# Altium PCB A00B01-AST.PcbDoc
Units mil, origin at the board's own origin, x right, y up, seen from the top; angles counter-clockwise.
Board outline 2310.03 x 1090.03 mil, 2 copper layers (Top Layer, Bottom Layer); 37 components, 26 nets, 133 pads, 49 vias.
Unrouted connection lines stored in the file: 1.
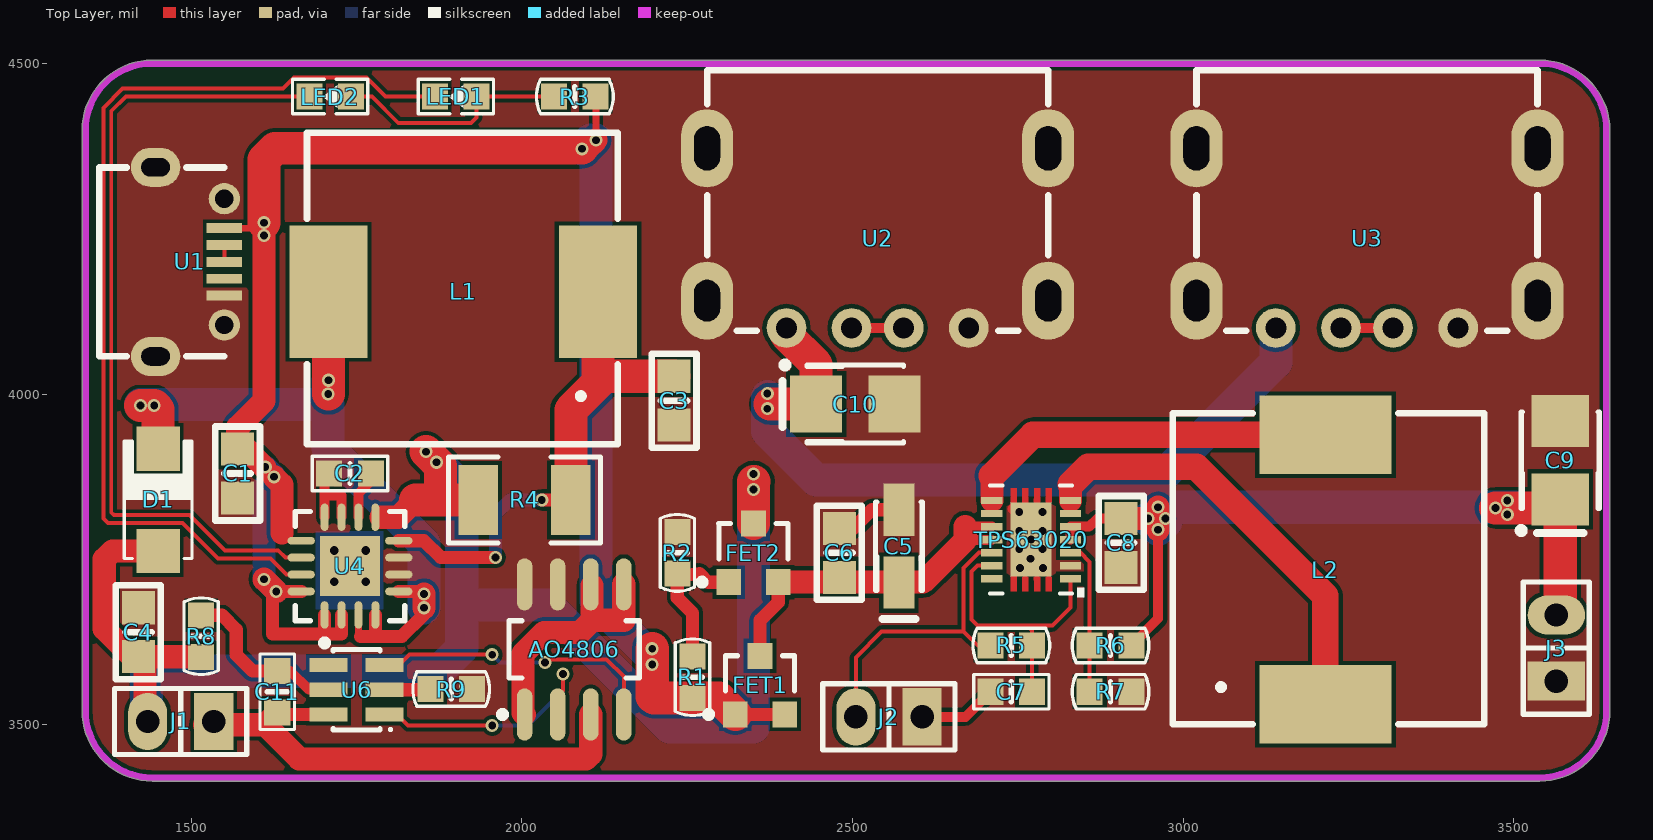
[diagram p0: Top Layer view]
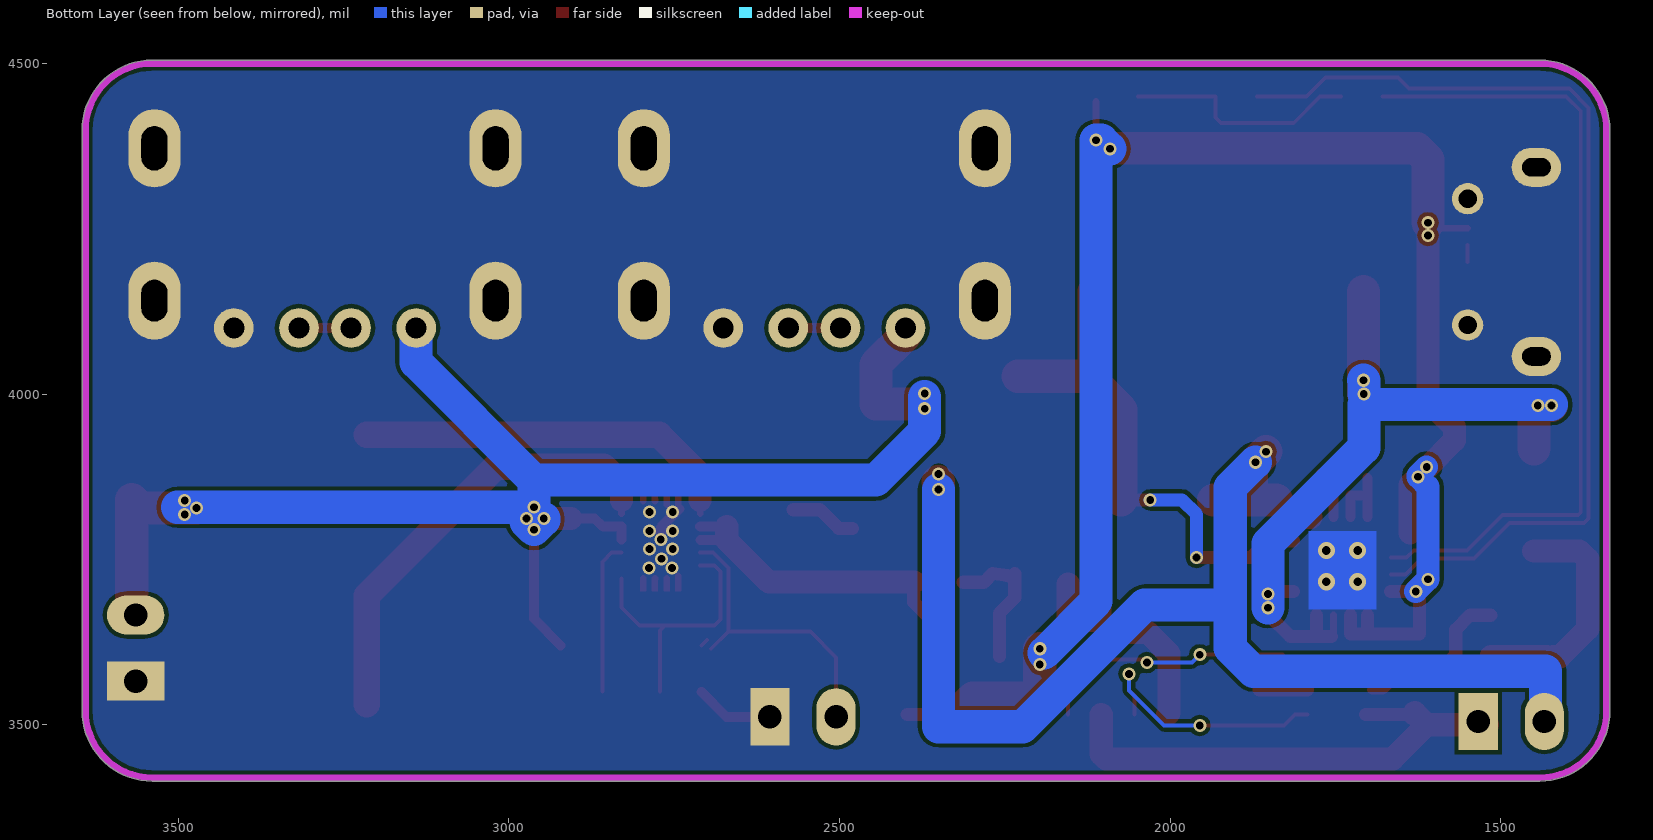
[diagram p1: Bottom Layer view, seen from below]

## Layer stack, top to bottom
Top Solder: solder mask 0.4, Solder Resist, Dk 3.5
Top Layer: signal copper 1.4
Dielectric 1: dielectric 12.6, FR-4, Dk 4.8
Bottom Layer: signal copper 1.4
Bottom Solder: solder mask 0.4, Solder Resist, Dk 3.5

## Board outline
1441,3414.99 cw(c1441,3521) 1334.98,3521 1334.98,4399 cw(c1441,4399) 1441,4505.02 3539,4505.02 cw(c3539,4399) 3645.01,4399 3645.01,3521 cw(c3539,3521) 3539,3414.99

## Design rules (kind name [scope] priority, off if disabled: settings)
Clearance [All] p1: gap=6
PlaneConnect PlaneConnect_1 [InNet('GND')] p1: planeconnectstyle=Direct reliefexpansion=20 reliefentries=4 reliefconductorwidth=10 reliefairgap=10
PlaneConnect [All] p2: planeconnectstyle=Relief reliefexpansion=20 reliefentries=4 reliefconductorwidth=10 reliefairgap=10
PolygonConnect PolygonConnect_1 [InNet('GND')] p1: connectstyle=Direct reliefconductorwidth=10 reliefentries=4 polygonreliefangle="90 Angle" airgapwidth=10
PolygonConnect [All] p2: connectstyle=Relief reliefconductorwidth=10 reliefentries=4 polygonreliefangle="90 Angle" airgapwidth=10
RoutingVias [All] p1: holewidth=28 width=50 viastyle="Through Hole" minholewidth=28 minwidth=50 maxholewidth=28 maxwidth=50
SolderMaskExpansion [All] p1: expansion=4
Width [All] p1: maxlimit=200 minlimit=6 preferedwidth=10 minimp=50.000000 maximp=50.000000 favimp=50.000000
29 further rules are at their usual default settings.

## Components (designator, comment, footprint, x,y, rotation, side; value= is the part's Value field where it differs from the comment)
AO4806 "U7" SOP-8 2079,3614 r90 top
C1 "22uF 0805" SMT_C_0805 1570,3880 r270 top
C2 "0.1uF" SMT_C_0603 1740,3880 r0 top
C3 "22uF 0805" SMT_C_0805 2230,3990 r270 top
C4 "22uF 0805" SMT_C_0805 1420,3640 r90 top
C5 "100uF 6.3V" SMT_C_Tantalum_A 2570,3770 r90 top
C6 "22uF 6.3V" SMT_C_0805 2480,3760 r90 top
C7 "0.1uF" SMT_C_0603 2740,3550 r180 top
C8 "22uF 6.3V" SMT_C_0805 2906,3775 r270 top
C9 "220uF 6.3V" SMT_C_Tantalum_B 3570,3900 r90 top
C10 "220uF 6.3V" SMT_C_Tantalum_B 2504,3985 r0 top
C11 "100nF" SMT_C_0603 1630,3550 r90 top
D1 "SS24" SMT_DIODE_DO_214AC 1450,3840 r90 top
FET1 "AO3402-N-Ch-MOSFET" AO3402-N-Ch-MOSFET 2360,3560 r0 top
FET2 "AO3401-P-Ch-MOSFET" AO3401-P-Ch-MOSFET 2350,3760 r0 top
J1 "THT_Male_P_1x2" THT_Male_P_1x2-2.54mm 1534,3505 r270 top
J2 "THT_Male_P_1x2" THT_Male_P_1x2-2.54mm 2605,3512 r270 top
J3 "THT_Male_P_1x2" THT_Male_P_1x2-2.54mm 3564,3566 r180 top
L1 "4.7uH" SMT_L_11.5mm 1910,4160 r180 top
L2 "1uH" SMT_L_11.5mm 3220,3736 r90 top
LED1 "SMT_LED_0603" SMT_LED_0603 1900,4450 r180 top
LED2 "SMT_LED_0603" SMT_LED_0603 1710,4450 r180 top
R1 "100oHm" SMT_R_0603 2258,3572 r90 top
R2 "5.6K" SMT_R_0603 2235,3760 r90 top
R3 "1K" SMT_R_0603 2080,4450 r0 top
R4 "0.05R" 1210 2004,3840 r0 top
R5 "12K" SMT_R_0603 2740,3620 r180 top
R6 "1M" SMT_R_0603 2890,3620 r0 top
R7 "180K" SMT_R_0603 2890,3550 r180 top
R8 "100R" SMT_R_0603 1515,3634 r90 top
R9 "1k" SMT_R_0603 1893,3554 r180 top
TPS63020 "U5" VSON-14 2770,3780 r180 top
U1 "USB_Micro_5S_B" USB_MICRO_5S_B 1550,4200 r90 top
U2 "USB-A-Female-SMD" USB-A-SMD 2400,4100 r0 top
U3 "USB-A-Female-SMD" USB-A-SMD 3140,4100 r0 top
U4 "TP5000" QFN-16 1740,3740 r90 top
U6 "DW01-PLUS" SOT23-6 1750,3553 r90 top

## Footprints (in the part's own frame and the unit in brackets; to place one, negate y for a bottom-side part, rotate by r counter-clockwise, add the part's x,y. Pads: shape width x height; smd on the part's side, far side on the other; paste and mask are expansions set on the pad)
1210 [mil] "贴片元件"
  rect 60x106.3 smd: 1(-70,0) 2(70,0)
  silkscreen extent -115,-65 115,65, body extent -65,-50 65,50, height 39
AO3401-P-Ch-MOSFET [mm] "AO3401-P-Ch-MOSFET"
  rect 0.95x1 smd: 1(-0.95,-1.125) 2(0.95,-1.125) 3(0,1.125)
  silkscreen extent -2.1,-1.25 1.32,1.13, body extent -1.45,-1.4 1.45,1.4, height 1.3
AO3402-N-Ch-MOSFET [mm] "AO3402-N-Ch-MOSFET"
  rect 0.95x1 smd: 1(-0.95,-1.125) 2(0.95,-1.125) 3(0,1.125)
  silkscreen extent -2.1,-1.25 1.32,1.13, body extent -1.45,-1.4 1.45,1.4, height 1.3
QFN-16 [mm] "QFN"
  oval 1.05x0.3 smd: 1(-1.875,0.975) 2(-1.875,0.325) 3(-1.875,-0.325) 4(-1.875,-0.975) 9(1.875,-0.975) 10(1.875,-0.325) 11(1.875,0.325) 12(1.875,0.975)
  oval 0.3x1.05 smd: 5(-0.975,-1.875) 6(-0.325,-1.875) 7(0.325,-1.875) 8(0.975,-1.875) 13(0.975,1.875) 14(0.325,1.875) 15(-0.325,1.875) 16(-0.975,1.875)
  rect 2.3x2.3 smd: 17(0,0)
  silkscreen extent -3.07,-2.1 2.1,2.1, body extent -2.07,-2.07 2.07,2.07, height 0.8
SMT_C_0603 [mm] "Surface mount capacitor 0603"
  rect 1x1 smd: 1(-0.8,0) 2(0.8,0)
  silkscreen extent -1.45,-0.66 1.45,0.66, body extent -1,-0.39 1,0.39, height 0.79
SMT_C_0805 [mil] "Surface mount capacitor 0805"
  rect 50x50 smd: 1(-37,0) 2(37,0)
  silkscreen extent -71,-34 71,34, body extent -49,-24 49,25, height 31
SMT_C_Tantalum_A [mm] "Capacitor, SM Tantalum; Body 3.2 x 1.6 mm (LxW typ)"
  rect 2x1.2 smd: 1(-1.4,0) 2(1.4,0)
  silkscreen extent -2.79,-0.9 1.7,0.9, body extent -1.6,-0.8 1.6,0.8, height 1.6
SMT_C_Tantalum_B [mm] "Capacitor, SM Tantalum; Body 3.5 x 2.8 mm (LxW typ)"
  rect 2x2.2 smd: 1(-1.5,0) 2(1.5,0)
  silkscreen extent -2.82,-1.5 1.85,1.62, body extent -1.75,-1.4 1.75,1.4, height 1.9
SMT_DIODE_DO_214AC [mm] "DO-214AC(SMA) Package"
  rect 1.7x1.67 smd: 1(-1.965,0) 2(1.965,0)
  silkscreen extent -2.25,-1.3 2.25,1.3, body extent -2.6,-1.3 2.6,1.3, height 2.35
SMT_L_11.5mm [mil] "Vishay HLP4040 SMT Inductor,11.5x11.5x4mm"
  rect 118.11x200 smd: 1(-205,5) 2(202.5,5)
  silkscreen extent -235,-235 235,236, body extent -236,-235 235,236, height 157
SMT_LED_0603 [mm] "SMT LED"
  rect 1x1 smd: 1(-0.8,0) 2(0.8,0)
  silkscreen extent -1.45,-0.66 1.45,0.66, body extent -0.81,-0.4 0.81,0.4, height 0.6
SMT_R_0603 [mm] "Surface mount resistor 0603"
  rect 1x1 smd: 1(-0.8,0) 2(0.8,0)
  silkscreen extent -1.47,-0.66 1.47,0.66, body extent -1,-0.39 1,0.39, height 0.79
SOP-8 [mm] "8-Pin Small Outline Integrated Circuit 1.27 mm Pitch, IPC Low Density"
  oval 2x0.6 smd: 1(-2.5,1.905) 2(-2.5,0.635) 3(-2.5,-0.635) 4(-2.5,-1.905) 5(2.5,-1.905) 6(2.5,-0.635) 7(2.5,0.635) 8(2.5,1.905)
  silkscreen extent -2.62,-2.5 1.1,2.88, body extent -2.92,-2.45 2.86,2.45, height 1.45
SOT23-6 [mm] "SOT-457/SC-74; 6 Leads; Body 3 x 3 mm, inc. leads (LxW max)"
  rect 0.55x1.45 smd: 1(-0.95,-1.075) 2(0,-1.075) 3(0.95,-1.075) 4(0.95,1.075) 5(0,1.075) 6(-0.95,1.075)
  silkscreen extent -1.57,-1.35 1.55,0.9, body extent -1.45,-1.4 1.45,1.4, height 1.45
THT_Male_P_1x2-2.54mm [mm] "THT Male pin header strip 1x2 2.54mm pitch"
  rect 2.2x1.5 hole 0.9: 1(0,0)
  oval 2.2x1.5 hole 0.9: 2(0,-2.54)
  silkscreen extent -1.27,-3.81 1.27,1.27, body extent -1.46,-3.81 1.46,1.27, height 8.51
USB-A-SMD [mm]
  round 1.524 hole 0.8: 1(0,0) 2(2.5,0) 3(4.5,0) 4(7,0)
  oval 2x3 hole 1 slot 1.6 at 90 deg: 5(10.05,1.05) 8(-3.05,1.05)
  oval 2x3 hole 1 slot 1.7 at 90 deg: 6(10.05,6.9) 7(-3.05,6.9)
  silkscreen extent -3.05,-0.1 10.05,9.9, body extent -3.56,-0.13 10.54,9.91, height 6.7
USB_MICRO_5S_B [mil] "USB Micro SMT 5S B"
  rect 15x54 smd: 1(51,0) 2(25.5,0) 3(0,0) 4(-25.5,0) 5(-51,0)
  oval 59.06x74.8 hole 27.56 slot 43.31 at 90 deg: 6(-143,104) 7(143,104)
  round 47.24 hole 27.5: 8(95.5,0) 9(-95.5,0)
  silkscreen extent -143,0 143,189, body extent -161,-9 161,204, height 105
VSON-14 [mm]
  rect 0.82x0.28 smd paste-0.397: 1(-1.51,1.5) 2(-1.51,1) 3(-1.51,0.5) 4(-1.51,0) 5(-1.51,-0.5) 6(-1.51,-1) 7(-1.51,-1.5) 8(1.51,-1.5) 9(1.51,-1) 10(1.51,-0.5) 11(1.51,0) 12(1.51,0.5) 13(1.51,1) 14(1.51,1.5)
  rect 1.58x2.85 smd paste-1.412 mask-1.41: 15(0,0)
  Top Layer region: -0.56,1.975 -0.56,1.527 -0.79,1.527 -0.79,1.975
  Top Layer region: -0.11,1.975 -0.11,1.527 -0.34,1.527 -0.34,1.975
  Top Layer region: 0.11,1.975 0.11,1.527 0.34,1.527 0.34,1.975
  Top Layer region: 0.56,1.975 0.56,1.527 0.79,1.527 0.79,1.975
  Top Layer region: 0.56,-1.975 0.56,-1.527 0.79,-1.527 0.79,-1.975
  Top Layer region: 0.11,-1.975 0.11,-1.527 0.34,-1.527 0.34,-1.975
  Top Layer region: -0.11,-1.975 -0.11,-1.527 -0.34,-1.527 -0.34,-1.975
  Top Layer region: -0.56,-1.975 -0.56,-1.527 -0.79,-1.527 -0.79,-1.975
  silkscreen extent -2.03,-2.07 1.58,2.22

## Part data
AO4806: library part AO4806
C1 C3 C4 C6 C8: library part SMT_C_0805, "Surface mount capacitor 0805"
C2 C7 C11: library part SMT_C_0603, "Surface mount capacitor 0603"
C5: library part SMT_C_Tantalum_A, "Capacitor, SM Tantalum; Body 3.2 x 1.6 mm (LxW typ)"
C9 C10: library part SMT_C_Tantalum_B, "Capacitor, SM Tantalum; Body 3.5 x 2.8 mm (LxW typ)"
D1: library part SMT_DIODE_SCHOTTKY_DO_214AC, "Surface mount schottky diode DO-214AC(SMA) Package"
FET1: "AO3402-N-Ch,4A,30V.RDS(ON) = 0.11Ω @ VGS = 2.5V"
FET2: "AO3401-P-Ch,-4.2A, -30V.RDS(ON) = 0.12Ω @ VGS = -2.5 V"
J1 J2 J3: "THT Male pin header strip 1x2"
L1 L2: library part SMT_L_11.5mm, "Vishay HLP4040 SMT Inductor,11.5x11.5x4mm"
LED1 LED2: "SMT LED"
R1 R2 R3 R5 R6 R7 R8 R9: library part SMT_R_0603, "Surface mount resistor 0603"
R4: library part SMT_R_0805, "Surface mount resistor 0805"
TPS63020: library part TPS63020
U1: "USB micro female SMT with 4 fixed foot"
U6: "One Cell Lithium-ion/Polymer Battery Protection IC"

## Via types
v1: diameter 19.68, hole 11.81, Top Layer to Bottom Layer, 45 vias
v2: diameter 25.98, hole 12.99, Top Layer to Bottom Layer, tented top, 4 vias

## Nets (pads, with @x,y where several pads share a name; then routed paths per layer and width w, separated by ;. In a path a pad name is that pad's centre, name@x,y a point inside that pad or via, vN(x,y) a via of type N, cw(c..) or ccw(c..) an arc to the next point about the centre after c; other vN are vias at no path point)
BAT_GND: AO4806.3 C11.1 J1.1 U6.6 | length 771.9
  Top Layer w20: C11.1@1630,3515.67 U6.6@1704.6,3515.67
  Top Layer w35: J1.1@1520,3500 C11.1@1611.5,3500 ; C11.1@1630,3515.67 C11.1 C11.1@1611.5,3500 ; AO4806.3 2104,3455.5 2097,3448.5 1663,3448.5 C11.1@1611.5,3500
CHG_STDBY: LED2.2 U4.14 | length 1231.1
  Top Layer w6: U4.14 1642.2,3752.8 1631.5,3763.5 1551,3763.5 1497.4,3817.1 1408.43,3817.1 1408.33,3817 1383,3817 1379,3821 1379,4428 1401,4450 LED2.2
EN: J2.2 R5.2 TPS63020.12 | length 465.4
  Top Layer w6: J2.2 2505,3602 2544,3641 2668,3641 ; R5.2@2694,3615 2668,3641 ; R5.2@2700.5,3628 R5.2 ; TPS63020.12 2691.31,3760.31 2668,3737 2668,3641
GND: AO4806.7 AO4806.8 C1.2 C2.1 C3.2 C4.2 C5.2 C6.2 C7.2 C8.2 C9.2 C10.2 J2.1 J3.1 R2.2 R7.1 R9.1 TPS63020.2 TPS63020.15 U1.5 U1.6 U1.7 U1.8 U1.9 U2.4 U2.5 U2.6 U2.7 U2.8 U3.4 U3.5 U3.6 U3.7 U3.8 U4.6 U4.7 U4.11 U4.12 U4.17 | length 397
  Top Layer w15: U4.12 1701.61,3847 ; C2.1@1701.61,3873.11 1701.61,3847 ; U4.11 1727,3814.02 1727,3847 1701.61,3847 ; J2.1 2670.5,3512 C7.2 ; TPS63020.15@2742,3826.6 2770,3798.6 v1(2770,3780)
  Top Layer w20: C6.2 2501,3797 2529.12,3825.12 C5.2
  other v1: 2753,3737 2788,3737 2769,3751 2752,3766 2787,3766 2752,3793 2787,3793 2752,3822 2787,3822
LED_CHRG: LED1.2 U4.15 | length 1487.7
  Top Layer w6: U4.15 1643.8,3727.2 1619.5,3751.5 1540.2,3751.5 1486.6,3805.1 1413.4,3805.1 1413.3,3805 1374.03,3805 1367,3812.03 1367,4432.97 1396.03,4462 1638.41,4462 1655.09,4478.69 1764.91,4478.69 1793.59,4450 LED1.2
NetAO4806_1: AO4806.1 AO4806.5 AO4806.6 | length 373.2
  Top Layer w35: AO4806.1 2001.66,3517.92 2001.66,3607.81 2033.19,3639.34 2087.34,3639.34 2106,3658 ; AO4806.6@2106,3710.43 2106,3658 ; AO4806.5 2154,3658 2106,3658
NetAO4806_2: AO4806.2 U6.1 | length 388.2
  Top Layer w6: U6.1 1811.4,3515.6 1828,3499 v1(1955,3499) ; AO4806.2 2054,3544 2062,3552 v1(2062,3577)
  Bottom Layer w6: v1(1955,3499) 2009,3499 2062,3552 v1(2062,3577)
NetAO4806_4: AO4806.4 U6.3 | length 443.2
  Top Layer w6: U6.3 1814.4,3590.4 1830,3606 v1(1955,3606) ; v1(2035,3594) 2039.84,3598.84 2128.16,3598.84 2154,3573 AO4806.4
  Bottom Layer w6: v1(1955,3606) 1967,3594 v1(2035,3594)
NetC2_2: C2.2 U4.10 | length 73.9
  Top Layer w15: U4.10 1752.8,3849.8 1771.5,3868.5 C2.2
NetC3_1: C3.1 L1.1 R4.2 U4.8 | length 781.8
  Top Layer w20: U4.8 1851.61,3778.39 1877,3753 v1(1960,3753) ; v1(2030,3840) R4.2
  Top Layer w50: R4.2 2074,3976 2115,4017 L1.1 ; 2125,4027 C3.1
  Bottom Layer w20: v1(1960,3753) 1960,3818 1982,3840 v1(2030,3840)
NetC7_1: C7.1 R5.1 TPS63020.1 TPS63020.13 | length 418.3
  Top Layer w6: TPS63020.13 2688.6,3740.63 2680,3732.03 2680,3659 2689,3650 2764,3650 ; C7.1 R5.1 2771.5,3642.5 2764,3650 ; TPS63020.1 2829.45,3677.45 2802,3650 2764,3650
NetC11_2: C11.2 R8.2 U6.5 | length 248.9
  Top Layer w15: C11.2 1649.5,3581.5 1678,3553 U6.5@1695,3553
  Top Layer w20: R8.2 1546.5,3665.5 1568,3644 1568,3606 1592.5,3581.5 C11.2
NetD1_2: D1.2 L1.2 U4.3 U4.4 U4.5 | length 1137.9
  Top Layer w10: 1752.8,3630.8 U4.3
  Top Layer w20: 1756.02,3633.61 1778.39,3633.61 ; U4.4 1778.39,3633.61 ; U4.5 1839.39,3701.61 ; 1850,3665 1818.61,3633.61 1778.39,3633.61
  Top Layer w35: v1(1852,3677) v1(1852,3698)
  Top Layer w50: v1(1423,3983) v1(1444,3983) 1450,3977 D1.2 ; v1@1707.5,4000 L1.2
  Bottom Layer w50: v1@1423,3984 1707,3984 1707,3918.82 1852,3773.82 v1(1852,3677) ; v1(1707,4000) 1707,4020.5 v1(1707.5,4021)
NetFET2_1: FET2.1 R1.2 R2.1 | length 207.6
  Top Layer w20: R2.1 2235,3692 2258,3669 R1.2 ; R2.1@2245,3725.5 2268.5,3728.5 2281.29,3715.71 FET2.1
NetL2_1: L2.1 TPS63020.6 TPS63020.7 | length 685.4
  Top Layer w10: TPS63020.6 TPS63020.7
  Top Layer w35: TPS63020.7 2829.45,3863.45
  Top Layer w40: 2829.45,3863.45 2856,3890 3020,3890 3215,3695 L2.1
NetL2_2: L2.2 TPS63020.8 TPS63020.9 | length 587.3
  Top Layer w10: TPS63020.9 TPS63020.8
  Top Layer w35: TPS63020.8 2710.55,3876.55
  Top Layer w40: 2710.55,3876.55 2772.5,3938.5 L2.2
NetLED1_1: LED1.1 LED2.1 R3.1 | length 358.6
  Top Layer w6: LED2.1 1773,4450 1813,4410 1923,4410 1931.5,4418.5 LED1.1 R3.1
NetR6_1: R6.1 R7.2 TPS63020.3 | length 231.3
  Top Layer w6: TPS63020.3 2844.68,3760.32 2858.5,3746.5 R7.2
NetR9_2: R9.2 U6.2 | length 73.2
  Top Layer w20: U6.2 R9.2@1865.5,3553
NetU1_2: U1.2 U1.3 | length 25.5
  Top Layer w6: U1.3 U1.2
NetU2_2: U2.2 U2.3 | length 78.7
  Top Layer w15: U2.2 U2.3
NetU3_2: U3.2 U3.3 | length 78.7
  Top Layer w15: U3.2 U3.3
VCC_BAT: C4.1 D1.1 FET2.3 J1.2 R4.1 R8.1 U4.9 | length 2486.4
  Top Layer w20: C4.1 C4.1@1430,3603
  Top Layer w35: C4.1 1410.77,3603 1368.5,3645.27 1368.5,3750.5 1380.64,3762.64 D1.1 ; J1.2@1430,3510 1430,3603 R8.1@1514.5,3603 ; 1787,3813.82 1812.82,3813.82 1839,3840
  Top Layer w50: 1839,3840 1877,3840 ; v1(1855,3913) v1(1871,3897) 1877,3891 1877,3840 ; R4.1 1877,3840 ; FET2.3 v1(2350,3856) 2350,3868 2351,3868
  Bottom Layer w50: J1.2@1432,3512 1432,3581 1874,3581 1909,3616 1909,3681 ; v1(1871,3897) 1909,3859 1909,3681 ; v1(2350,3856) 2350,3497 2222.8,3497 2038.8,3681 1909,3681
  other v1: 2350,3879
VCC_INPUT: C1.1 FET1.1 FET1.2 R1.1 R3.2 U1.1 U4.1 U4.2 U4.13 U4.16 | length 2831.7
  Top Layer w10: U1.1 1601.84,4251 v1(1610,4259.16) ; v1(2112,4384) R3.2@2112,4442.5
  Top Layer w20: U4.16 v1(1628.39,3701.61) 1622.8,3696.02 1622.8,3637.2 1727.2,3637.2 U4.2 ; 1701.61,3641.61 U4.1 ; FET1.1 FET1.2
  Top Layer w35: v1(1610,3720) v1(1628.39,3701.61) ; v1(1610,4259.16) v1(1610,4240) 1610,3990 1570,3950 1570,3930 v1@1611,3889 ; v1(1625,3875) 1637,3863 1637,3790 ; v1@2099,4371 v1(2112,4384)
  Top Layer w50: v1(1610,4259.16) 1610,4355 1626.33,4371.33 v1@2091,4372.31 ; v1(2197,3615) v1(2197,3591) 2197,3543 2199.5,3540.5 R1.1 2297.8,3540.5 FET1.1
  Bottom Layer w35: v1(1612,3890) 1625,3877 v1(1625,3875) 1610,3860 v1(1610,3720) v1(1628.39,3701.61)
  Bottom Layer w50: v1(2091,4371) 2104,4384 v1(2112,4384) 2112,3687 v1@2190.5,3608.5
VCC_VBUS: C5.1 C6.1 FET1.3 FET2.2 TPS63020.10 TPS63020.11 | length 532.2
  Top Layer w15: 2670.32,3779.33 TPS63020.11@2709.88,3779.33 ; 2670.32,3799.68 TPS63020.10
  Top Layer w20: FET1.3 2360,3658 2387.4,3685.4 FET2.2
  Top Layer w35: FET2.2 2569.17,3715.71 2606.7,3715.71 2670.32,3779.33 2670.32,3799.68
VDD_5V: C8.1 C9.1 C10.1 J3.2 R6.2 TPS63020.4 TPS63020.5 U2.1 U3.1 | length 2453
  Top Layer w15: TPS63020.4 TPS63020.5 2857.78,3799.69 2870.09,3812 C8.1 ; R6.2 2962,3660.5 v1(2962,3795)
  Top Layer w35: C8.1 2962,3812 ; v1(2962,3795) 2962,3812 ; v1(2962,3829) 2962,3812
  Top Layer w50: v1@2375,3985 C10.1 2444.94,4045.06 2400,4090 U2.1 ; v1(3472,3828) 3557.06,3828 C9.1 3570,3672 J3.2
  Bottom Layer w50: v1@2371,3996 v1(2371,3978) 2371,3944 2445,3870 2962,3870 ; v1(2947,3812) 2947,3810 v1(2962,3795) v1@2974,3807 ; v1(2962,3829) 2962,3870 ; 2974,3829 3501,3829 ; U3.1 3140,4048 2962,3870
  other v1: 2973,3812 3490,3818 3490,3839 2371,4001
pads on no net: TPS63020.14 U1.4 U6.4
copper on no net: | length 31.4
  Top Layer w10: 2743.43,3719.9 2743.43,3725.57 ; 2743.43,3831.43 2743.43,3840.1 ; 2761.14,3719.9 2761.14,3721.86 ; 2761.14,3832.86 2761.14,3840.1 ; 2778.86,3719.9 2778.86,3721.86 ; 2778.86,3838.14 2778.86,3840.1 ; 2796.57,3719.9 2796.57,3721.86 ; 2796.57,3838.14 2796.57,3840.1
  other v2: 1716.38,3716.38 1763.62,3716.38 1716.38,3763.62 1763.62,3763.62

## Polygon pours and split planes (outlines as drawn)
GND on Top Layer "GND_L01_P000" (solid, remove dead copper, pour order 0): 1340,4500 1340,3420 3640,3420 3640,4500
GND on Bottom Layer "GND_L02_P002" (solid, remove dead copper, pour order 2): 1340,4500 1340,3420 3640,3420 3640,4500

## Keep-outs
Keep-Out Layer:
  lines w10: 1340,3521 ccw(c1441,3521) 1441,3420 3539,3420 ccw(c3539,3521) 3640,3521 3640,4399 ccw(c3539,4399) 3539,4500 1441,4500 ccw(c1441,4399) 1340,4399 1340,3521

## Other copper
Bottom Layer:
  rectangle net GND: 1688,3674 1791,3793

## Silkscreen, mask and mechanical layers (free items; w line width, h text height)
Top Solder:
  rectangle: 1396,4098 1500,4161
  rectangle: 1396,4167 1500,4230
  rectangle: 1396,4237 1500,4300
  lines w10: 1397,3629 1376,3650 1376,3745 1386,3755 1422,3755 ; 1398,3604 1359,3643 1359,3753 1380,3774 1418,3774 ; 1413,3579 1413,3529 1426,3542 1426,3580 ; 1550,3510 1620,3510 ; 1552,3491 1609,3491 1660,3440 2100,3440 2112,3452 2112,3491 ; 1564,3946 1564,3960 1603,3999 1603,4223 1610,4230 ; 1582,3947 1582,3957 1618,3993 1618,4222 1610,4230 ; 1599,4261 1594,4266 1594,4358 1623,4387 2103,4387 ; 1610,4227 1610,4230 ; 1610,4240 1610,4230 ; 1610,4259.16 1628,4277.16 1628,4345 1638,4355 2090,4355 ; 1610,4269 1610,4348 1633,4371 2091,4371 ; 1625,3499 1625,3496 1664,3457 2094,3457 2098,3461 2098,3484 ; 1990,3544 1990,3609 2032,3651 2082,3651 2096,3665 2096,3687 ; 2012,3548 2012,3605 2038,3631 2090,3631 2109,3650 2143,3650 2154,3661 2154,3682 ; 2416,3715 2607,3715 2608,3716 2666,3774 2670,3778 2670,3807 ; 2700,3862 2700,3880 2768,3948 3117,3948 ; 2721,3860 2721,3872 2776,3927 3176,3927 ; 2819,3858 2819,3867 2854,3902 3023,3902 3027,3902 3226,3703 3226,3558 ; 2839,3858 2842,3858 2862,3878 3015,3878 3202,3691 3204,3689 3204,3573
Bottom Solder:
  lines w10: 1432,3547 1417,3532 1417,3587 1430,3600 1552,3600 1870,3600 1892,3622 1892,3677 ; 1432,3583 1549,3583 1877,3583 1909,3615 1909,3665 1924,3680 2042,3680 2223,3499 2345,3499 2350,3504 2350,3856 2334,3840 2334,3519 2331,3516 2228,3516 2048,3696 1911,3696 ; 1439,3537 1440,3538 1440,3567 1547,3567 1885,3567 1925,3607 1925,3659 1931,3665 2036,3665 2220,3481 2353,3481 2368,3496 2368,3785 2368,3865 2358,3875 ; 1444,3983 1693,3983 1706,3970 1706,3925 1706,3920 1852,3774 1852,3698 ; 1599,4260 1599,4261 ; 1602,3727 1602,3862 1614,3874 1614,3869 1618,3865 1618,3717 ; 1707,3971 1707,4000 ; 1842,3905 1892,3855 1892,3677 ; 1844,3677 1834,3687 1834,3773 1690,3917 1690,3960 1683,3967 1430,3967 1423,3974 1423,3983 1423,3985 1438,4000 1707,4000 ; 1852,3677 1868,3693 1868,3778 1722,3924 1722,3990 1712,4000 1707,4000 ; 1855,3913 1907,3861 1907,3692 1892,3677 ; 1868,3925 1868,3922 1925,3865 1925,3700 ; 2095,4363 2095,3681 2191,3585 ; 2110,4373 2110,3684 2186,3608 ; 2125,4386 2125,4382 2128,4379 2128,3689 2158,3659 2191,3626 ; 2386,4001 2386,3948 2452,3882 2960,3882 ; 2960,3890 2960,3882 ; 2962,3829 2973,3829 2989,3845 3462,3845 3484,3845 ; 2962,3838 2945,3855 2437,3855 2356,3936 2356,4001 2371,4001 2371,3943 2445,3869 2953,3869 2978,3844 ; 2963,3893 3123,4053 3123,4074 ; 2967.5,3874.5 3140,4047 3140,4067 ; 2972,3799 2979,3799 2992,3812 3460,3812 3479,3812 ; 2973,3812 2975,3812 2991,3828 3472,3828 ; 2978,3834 2978,3864 ; 3155,4070 3155,4041 2978,3864 ; 2960,3882 2978,3864

## Text inside footprints (layer, text, board x,y; h text height)
U2: Mechanical 1 "PCB Edge" at 2765,4475 h30 r180
U3: Mechanical 1 "PCB Edge" at 3505,4475 h30 r180